# EAGLE board pfeffer_main_circuit (EAGLE 8.0.0)
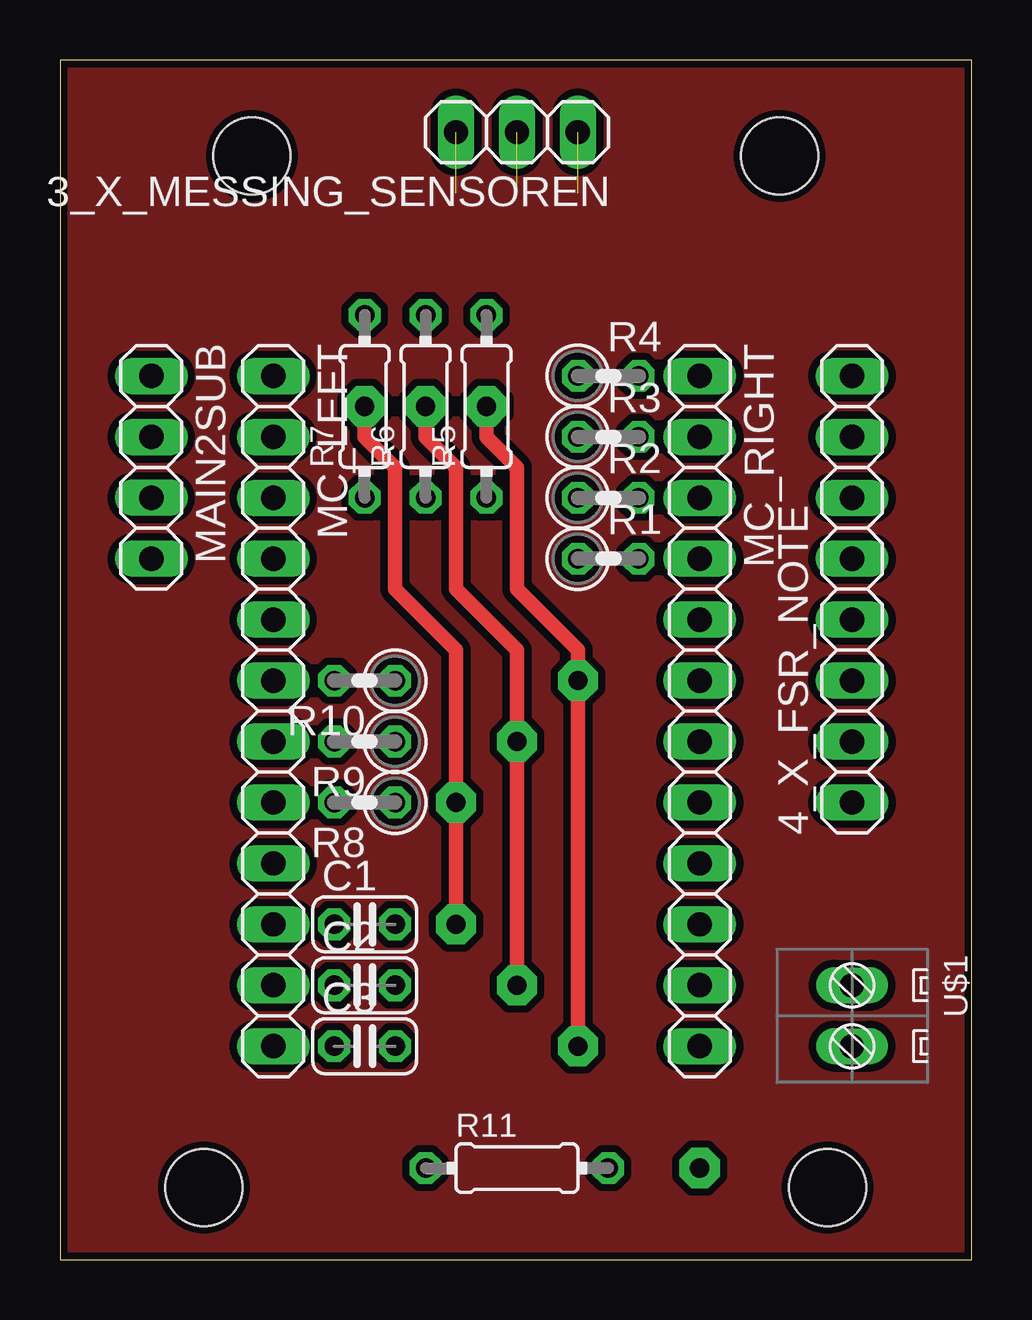
[diagram p0: board, top side]
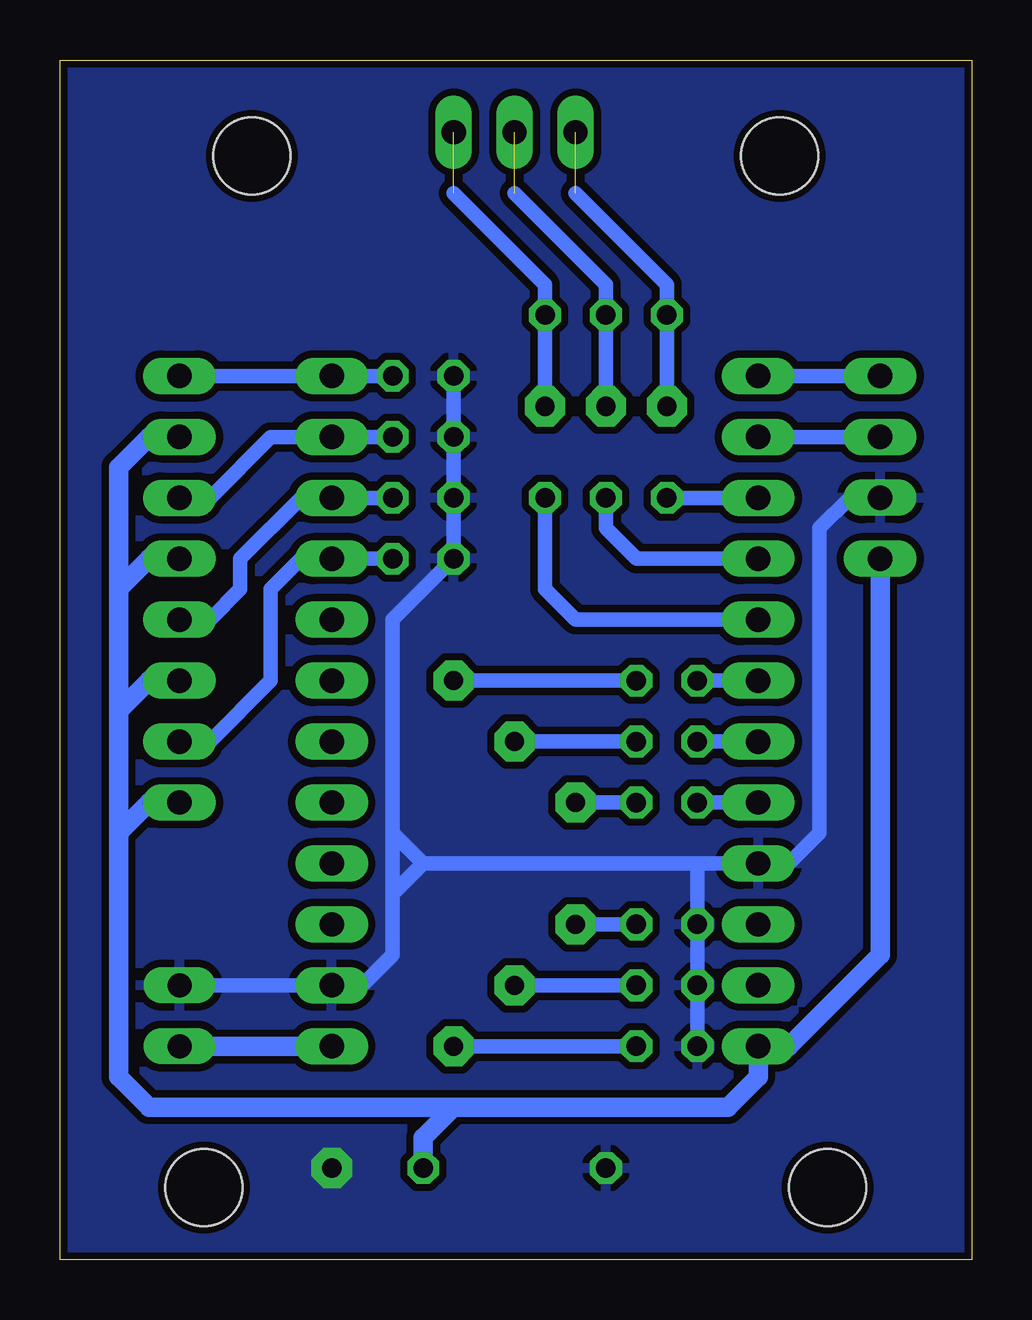
[diagram p1: board, bottom side, seen from below]

Size 38 x 50 mm. Coordinates in mm from the lower left corner, seen from the top.
Outline: 0,0 38,0 38,50 0,50 0,0
Copper layers (1*16): Top 0.035mm / dielectric 1.5mm / Bottom 0.035mm
Design rules "loetlabor": minimum track width 10mil, minimum drill 24mil, track to track 12mil, track to pad 12mil, pad to pad 12mil, via to via 12mil, smd to smd 10mil, copper to edge 12mil, drill to drill 12mil, minimum pad ring 10mil, minimum via ring 10mil, stop-mask expansion 4mil, vias tented up to drill 0mil, thermal gap 12mil
Holes 3.2 mm at 8,46 32,3 6,3 30,46

## Footprints (pad centres in the part's own frame; a part is rotated, then mirrored left to right if it is on the bottom)
1X03 = drill 1.016 long: 1 -2.54,0; 2 0,0; 3 2.54,0
1X08 = drill 1.016 long: 1 -8.89,0; 2 -6.35,0; 3 -3.81,0; 4 -1.27,0; 5 1.27,0; 6 3.81,0; 7 6.35,0; 8 8.89,0
C025-024X044 = drill 0.813 octagon: 1 -1.27,0; 2 1.27,0
1X04 = drill 1.016 long: 1 -3.81,0; 2 -1.27,0; 3 1.27,0; 4 3.81,0
1X12 = drill 1.016 long: 1 -13.97,0; 2 -11.43,0; 3 -8.89,0; 4 -6.35,0; 5 -3.81,0; 6 -1.27,0; 7 1.27,0; 8 3.81,0; 9 6.35,0; 10 8.89,0; 11 11.43,0; 12 13.97,0
0207/2V = drill 0.813 octagon: 1 -1.27,0; 2 1.27,0
0204/7 = drill 0.813 octagon: 1 -3.81,0; 2 3.81,0
DS308-2.54-02P = drill 1 long: 1 -1.27,0; 2 1.27,0

## Placement (x,y rotation side)
3_X_MESSING_SENSOREN  [1X03]  19.05,46.99 180 top
4_X_FSR_NOTE  [1X08]  33.02,27.94 90 top
C1  10p  [C025-024X044]  12.7,13.97 0 top
C2  10p  [C025-024X044]  12.7,11.43 0 top
C3  10p  [C025-024X044]  12.7,8.89 0 top
MAIN2SUB  [1X04]  3.81,33.02 270 top
MC_LEFT  [1X12]  8.89,22.86 270 top
MC_RIGHT  [1X12]  26.67,22.86 270 top
R1  10k  [0207/2V]  22.86,29.21 0 top
R2  10k  [0207/2V]  22.86,31.75 0 top
R3  10k  [0207/2V]  22.86,34.29 0 top
R4  10k  [0207/2V]  22.86,36.83 0 top
R5  100k  [0204/7]  17.78,35.56 90 top
R6  100k  [0204/7]  15.24,35.56 90 top
R7  100k  [0204/7]  12.7,35.56 90 top
R8  1k  [0207/2V]  12.7,19.05 180 top
R9  1k  [0207/2V]  12.7,21.59 180 top
R10  1k  [0207/2V]  12.7,24.13 180 top
R11  100k  [0204/7]  19.05,3.81 0 top
U$1  DS308-02  [DS308-2.54-02P]  33.02,10.16 270 top

## Library data of the parts
3_X_MESSING_SENSOREN 4_X_FSR_NOTE MAIN2SUB MC_LEFT MC_RIGHT = pinhead
C1-C3 R1-R11 = rcl
U$1 = myDegsonConnectors

## Nets
GND: C1.1 C2.1 C3.1 MAIN2SUB.3 MC_LEFT.9 MC_RIGHT.11 R1.1 R2.1 R3.1 R4.1 R11.1 U$1.1
N$1: 4_X_FSR_NOTE.2 MC_RIGHT.4 R1.2
N$2: 4_X_FSR_NOTE.4 MC_RIGHT.3 R2.2
N$3: 4_X_FSR_NOTE.6 MC_RIGHT.2 R3.2
N$4: 4_X_FSR_NOTE.8 MC_RIGHT.1 R4.2
N$5: MC_RIGHT.12 U$1.2
N$6: MAIN2SUB.1 MC_LEFT.1
N$7: MC_LEFT.6 R10.2
N$9: 3_X_MESSING_SENSOREN.1 C3.2 R5.2 R10.1
N$10: 3_X_MESSING_SENSOREN.2 C2.2 R6.2 R9.1
N$11: 3_X_MESSING_SENSOREN.3 C1.2 R7.2 R8.1
N$12: MC_LEFT.5 R5.1
N$13: MC_LEFT.3 R7.1
N$14: MC_LEFT.4 R6.1
N$16: MC_LEFT.7 R9.2
N$17: MC_LEFT.8 R8.2
N$19: MAIN2SUB.2 MC_LEFT.2
VCC: 4_X_FSR_NOTE.1 4_X_FSR_NOTE.3 4_X_FSR_NOTE.5 4_X_FSR_NOTE.7 MAIN2SUB.4 MC_LEFT.12 R11.2

## Tracks (layer width: path | path; a pad name or v marks a point on that pad's centre or on a via)
GND  (via drill 0.8 pad 1.68)
  Bottom 0.61: R4.1 R3.1 R2.1 R1.1 24.13,26.67 24.13,17.78 | 11.43,16.51 MC_LEFT.9 7.62,16.51 6.35,17.78 6.35,30.48 5.08,31.75 MAIN2SUB.3 | 11.43,16.51 22.86,16.51 | 24.13,15.24 24.13,17.78 | 24.13,15.24 24.13,12.7 25.4,11.43 MC_RIGHT.11 U$1.1 | 22.86,16.51 24.13,17.78 | 22.86,16.51 24.13,15.24 | 11.43,16.51 C1.1 C2.1 C3.1
  other vias: 26.67,3.81
  pour Bottom: 0,50 0,0 38,0 38,50
N$1
  Bottom 0.61: R1.2 MC_RIGHT.4 27.94,29.21 29.21,27.94 29.21,24.13 31.75,21.59 4_X_FSR_NOTE.2
N$2
  Bottom 0.61: 4_X_FSR_NOTE.4 31.75,26.67 30.48,27.94 30.48,29.21 27.94,31.75 MC_RIGHT.3 R2.2
N$3
  Bottom 0.61: 4_X_FSR_NOTE.6 31.75,31.75 29.21,34.29 MC_RIGHT.2 R3.2
N$4
  Bottom 0.61: R4.2 MC_RIGHT.1 4_X_FSR_NOTE.8
N$5
  Bottom 0.813: U$1.2 MC_RIGHT.12
N$6
  Bottom 0.61: MAIN2SUB.1 MC_LEFT.1
N$7
  Bottom 0.61: MC_LEFT.6 R10.2
N$9  (via drill 0.8 pad 1.68)  (1 unrouted)
  Top 0.61: v21.59,8.89 v21.59,24.13 21.59,25.4 19.05,27.94 19.05,33.02 17.78,34.29 v17.78,35.56
  Bottom 0.61: R10.1 v21.59,24.13 | v21.59,8.89 C3.2 | v17.78,35.56 R5.2 17.78,40.64 21.59,44.45
N$10  (via drill 0.8 pad 1.68)  (1 unrouted)
  Top 0.61: v19.05,11.43 v19.05,21.59 19.05,25.4 16.51,27.94 16.51,33.02 15.24,34.29 v15.24,35.56
  Bottom 0.61: R9.1 v19.05,21.59 | C2.2 v19.05,11.43 | v15.24,35.56 R6.2 15.24,40.64 19.05,44.45
N$11  (via drill 0.8 pad 1.68)  (1 unrouted)
  Top 0.61: v16.51,13.97 v16.51,19.05 16.51,25.4 13.97,27.94 13.97,33.02 12.7,34.29 v12.7,35.56
  Bottom 0.61: R8.1 v16.51,19.05 | v16.51,13.97 C1.2 | v12.7,35.56 R7.2 12.7,40.64 16.51,44.45
N$12
  Bottom 0.61: MC_LEFT.5 16.51,26.67 17.78,27.94 R5.1
N$13
  Bottom 0.61: MC_LEFT.3 R7.1
N$14
  Bottom 0.61: MC_LEFT.4 13.97,29.21 15.24,30.48 R6.1
N$16
  Bottom 0.61: MC_LEFT.7 R9.2
N$17
  Bottom 0.61: MC_LEFT.8 R8.2
N$18
  pour Top: 0,50 0,0 38,0 38,50
N$19
  Bottom 0.61: MAIN2SUB.2 MC_LEFT.2
VCC
  Bottom 0.813: 4_X_FSR_NOTE.7 34.29,34.29 35.56,33.02 35.56,27.94 | 21.59,6.35 10.16,6.35 8.89,7.62 MC_LEFT.12 7.62,8.89 3.81,12.7 MAIN2SUB.4 | 35.56,22.86 35.56,27.94 | 35.56,17.78 35.56,22.86 | 4_X_FSR_NOTE.5 34.29,29.21 35.56,27.94 | 4_X_FSR_NOTE.3 34.29,24.13 35.56,22.86 | 4_X_FSR_NOTE.1 34.29,19.05 35.56,17.78 | 21.59,6.35 22.86,5.08 R11.2 | 21.59,6.35 34.29,6.35 35.56,7.62 35.56,17.78